# EAGLE board PCB v13 (EAGLE 9.7.0)
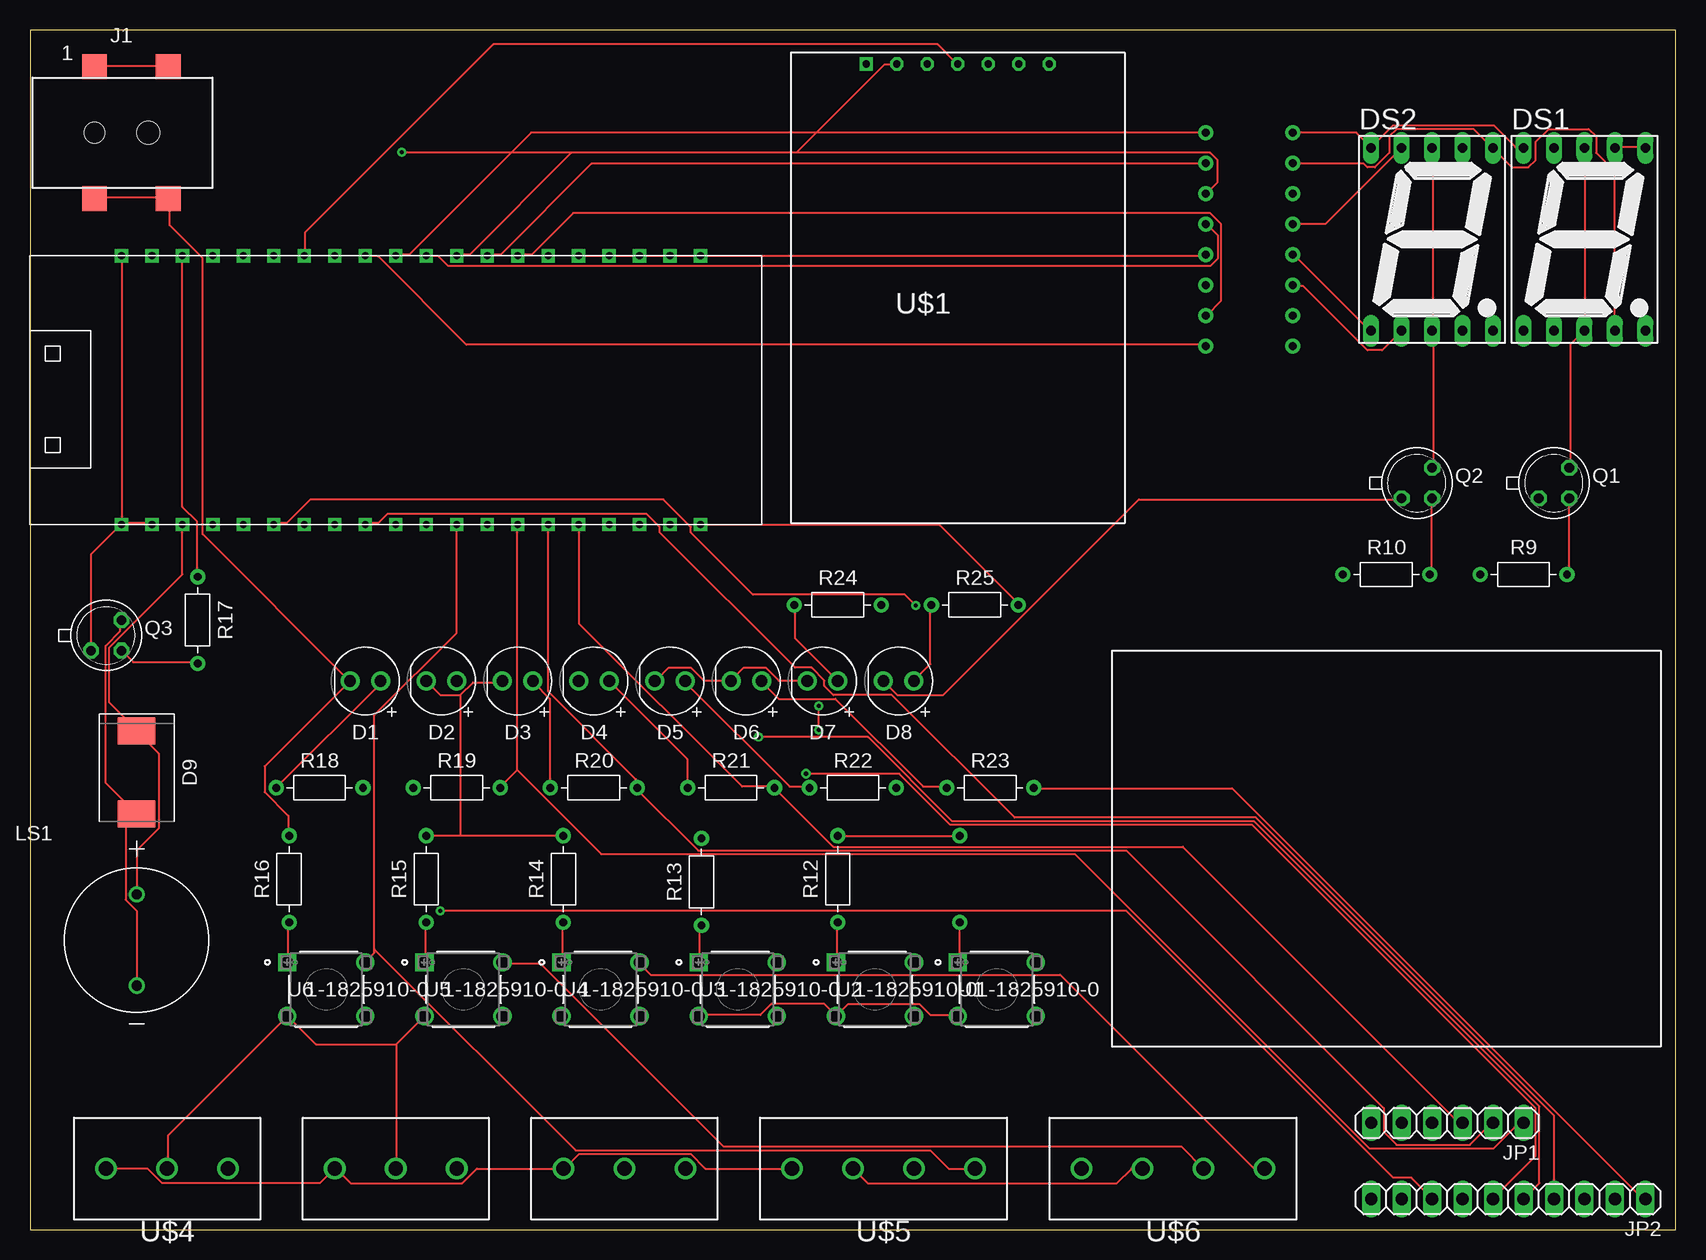
[diagram p0: board, top side]
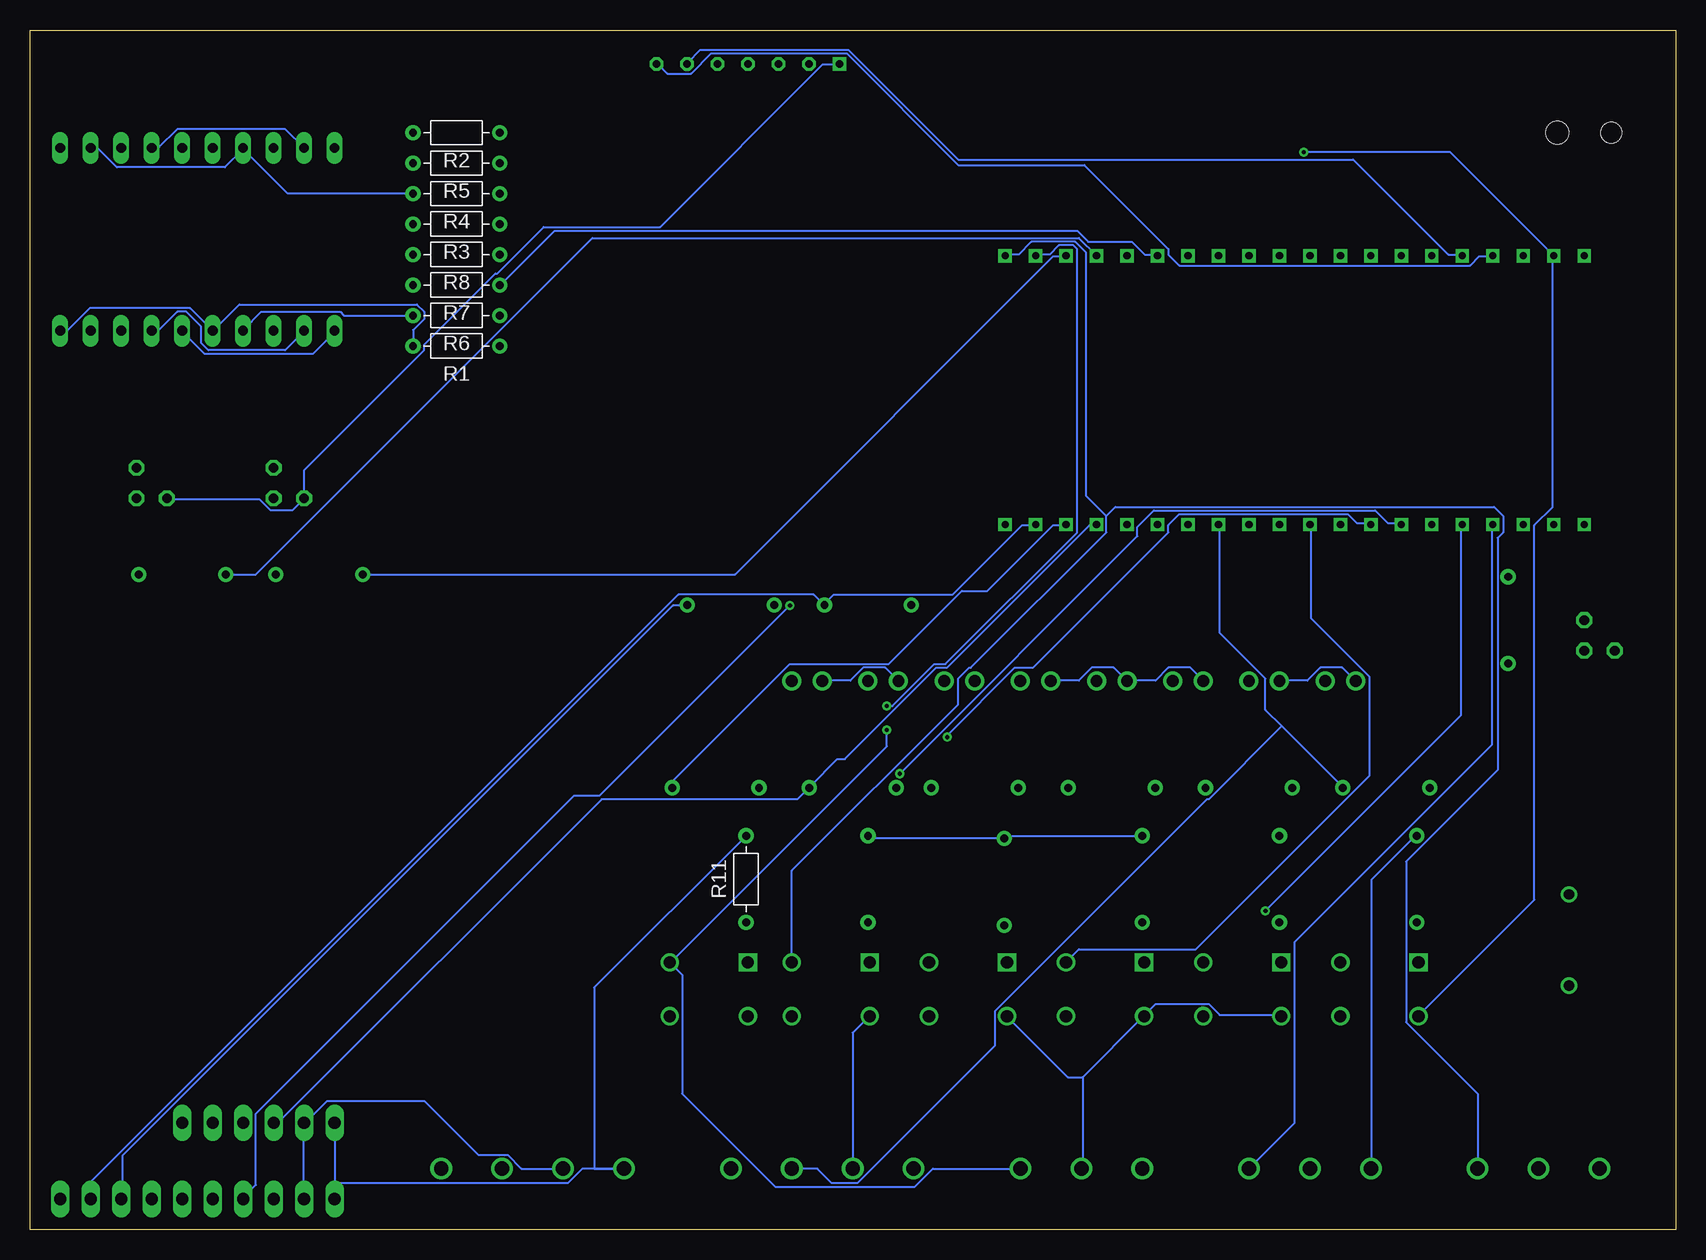
[diagram p1: board, bottom side, seen from below]

Size 137.14 x 100 mm. Coordinates in mm from the lower left corner, seen from the top.
Outline: 0,0 137.14,0 137.14,100 0,100 0,0
Copper layers (1*16): Top / Bottom
Stack-up Default Layer Stack: Top User Defined 0.035mm / Dielectric-1 User Defined 1.5mm / Bottom User Defined 0.035mm
Design rules "default": minimum track width 6mil, minimum drill 0.35mm, track to track 6mil, track to pad 6mil, pad to pad 6mil, via to via 6mil, smd to smd 6mil, copper to edge 40mil, drill to drill 6mil, minimum pad ring 10mil, minimum via ring 8mil, stop-mask expansion 4mil, vias tented up to drill 0mil, thermal gap 10mil

## Footprints (pad centres in the part's own frame; a part is rotated, then mirrored left to right if it is on the bottom)
LEDRD254W60D565H860B_G = drill 0.981 pad 1.581: 1 -1.27,0; 2 1.27,0
DIOM7959X625N = smd 2.252 x 3.12: 1 -3.457,0; 2 3.457,0
7SEG-13 = drill 0.813 long: 1 -5.08,-7.62; 2 -2.54,-7.62; 3 0,-7.62; 4 2.54,-7.62; 5 5.08,-7.62; 6 5.08,7.62; 7 2.54,7.62; 8 0,7.62; 9 -2.54,7.62; 10 -5.08,7.62
FRANZININHO = drill 0.6 square: P$1 36.83,1.168; P$2 39.37,1.168; P$3 41.91,1.168; P$4 44.45,1.168; P$5 46.99,1.168; P$6 49.53,1.168; P$7 52.07,1.168; P$8 54.61,1.168; P$9 57.15,1.168; P$10 59.69,1.168; P$11 34.29,1.168; P$12 31.75,1.168; P$13 29.21,1.168; P$14 26.67,1.168; P$15 24.13,1.168; P$16 21.59,1.168; P$17 19.05,1.168; P$18 16.51,1.168; P$19 13.97,1.168; P$20 11.43,1.168; P$21 59.69,-21.234; P$22 57.15,-21.234; P$23 54.61,-21.234; P$24 52.07,-21.234; P$25 49.53,-21.234; P$26 46.99,-21.234; P$27 44.45,-21.234; P$28 41.91,-21.234; P$29 39.37,-21.234; P$30 36.83,-21.234; P$31 34.29,-21.234; P$32 31.75,-21.234; P$33 29.21,-21.234; P$34 26.67,-21.234; P$35 24.13,-21.234; P$36 21.59,-21.234; P$37 19.05,-21.234; P$38 16.51,-21.234; P$39 13.97,-21.234; P$40 11.43,-21.234
694108106102 = smd 2.05 x 2.05: 1 -2.25,5.5; 2 -2.25,-5.5; 3 3.9,-5.5; A1 3.9,5.5 | hole 1.7: -2.25,0 | hole 1.9: 2.25,0
1X06 = drill 1.016 long: 1 -6.35,0; 2 -3.81,0; 3 -1.27,0; 4 1.27,0; 5 3.81,0; 6 6.35,0
1X10 = drill 1.016 long: 1 -11.43,0; 2 -8.89,0; 3 -6.35,0; 4 -3.81,0; 5 -1.27,0; 6 1.27,0; 7 3.81,0; 8 6.35,0; 9 8.89,0; 10 11.43,0
XDCR_AI-1223-TWT-5V-R = drill 0.85: N 0,-3.8; P 0,3.8
TO18 = drill 0.813 octagon: 1 -1.27,-1.27; 2 1.27,-1.27; 3 1.27,1.27
RESAD724W46L381D178B = drill 0.66 pad 1.26: 1 -3.62,0; 2 3.62,0
SWITCH_1-1825910-0 = drill 1.016 pad 1.524 square: 1 -6.502,4.496 | drill 1.016 pad 1.524: 2 -6.502,0; 3 0,0; 4 0,4.496
TFT = drill 0.6 octagon: BLK 7.46,17.31; DC 4.92,17.31; RES 2.38,17.31; SCL -2.7,17.31; SDA -0.16,17.31; VCC -5.24,17.31 | drill 0.6 square: GND -7.78,17.31
TERMBLK_508-3N = drill 1.2: 1 0,0; 2 5.08,0; 3 10.16,0
TERMBLK_508-4N = drill 1.2: 1 0,0; 2 5.08,0; 3 10.16,0; 4 15.24,0

## Placement (x,y rotation side)
D1  [LEDRD254W60D565H860B_G]  27.94,45.72 180 top
D2  [LEDRD254W60D565H860B_G]  34.29,45.72 180 top
D3  [LEDRD254W60D565H860B_G]  40.64,45.72 180 top
D4  [LEDRD254W60D565H860B_G]  46.99,45.72 180 top
D5  [LEDRD254W60D565H860B_G]  53.34,45.72 180 top
D6  [LEDRD254W60D565H860B_G]  59.69,45.72 180 top
D7  [LEDRD254W60D565H860B_G]  66.04,45.72 180 top
D8  [LEDRD254W60D565H860B_G]  72.39,45.72 180 top
D9  DIODE  [DIOM7959X625N]  8.89,38.1 270 top
DS1  7SEG-CA  [7SEG-13]  129.54,82.55 0 top
DS2  7SEG-CA  [7SEG-13]  116.84,82.55 0 top
FRANZ1  FRANZININHO  [FRANZININHO]  -3.81,80.01 0 top
J1  [694108106102]  7.62,91.44 0 top
JP1  PINHD-1X6  [1X06]  118.11,8.89 180 top
JP2  PINHD-1X10  [1X10]  123.19,2.54 180 top
LS1  AI-1223-TWT-5V-R  [XDCR_AI-1223-TWT-5V-R]  8.89,24.13 0 top
Q1  NPN  [TO18]  127,62.23 0 top
Q2  NPN  [TO18]  115.57,62.23 0 top
Q3  NPN  [TO18]  6.35,49.53 0 top
R1  350  [RESAD724W46L381D178B]  101.6,73.66 180 bottom
R2  350  [RESAD724W46L381D178B]  101.6,91.44 180 bottom
R3  350  [RESAD724W46L381D178B]  101.6,83.82 180 bottom
R4  350  [RESAD724W46L381D178B]  101.6,86.36 180 bottom
R5  350  [RESAD724W46L381D178B]  101.6,88.9 180 bottom
R6  350  [RESAD724W46L381D178B]  101.6,76.2 180 bottom
R7  350  [RESAD724W46L381D178B]  101.6,78.74 180 bottom
R8  350  [RESAD724W46L381D178B]  101.6,81.28 180 bottom
R9  350  [RESAD724W46L381D178B]  124.46,54.61 0 top
R10  350  [RESAD724W46L381D178B]  113.03,54.61 0 top
R11  350  [RESAD724W46L381D178B]  77.47,29.21 90 bottom
R12  350  [RESAD724W46L381D178B]  67.31,29.21 90 top
R13  350  [RESAD724W46L381D178B]  55.96,28.97 90 top
R14  350  [RESAD724W46L381D178B]  44.45,29.21 90 top
R15  350  [RESAD724W46L381D178B]  33.02,29.21 90 top
R16  350  [RESAD724W46L381D178B]  21.59,29.21 90 top
R17  350  [RESAD724W46L381D178B]  13.97,50.8 270 top
R18  350  [RESAD724W46L381D178B]  24.13,36.83 0 top
R19  350  [RESAD724W46L381D178B]  35.56,36.83 0 top
R20  350  [RESAD724W46L381D178B]  46.99,36.83 0 top
R21  350  [RESAD724W46L381D178B]  58.42,36.83 0 top
R22  350  [RESAD724W46L381D178B]  68.58,36.83 0 top
R23  350  [RESAD724W46L381D178B]  80.01,36.83 0 top
R24  350  [RESAD724W46L381D178B]  67.31,52.07 0 top
R25  350  [RESAD724W46L381D178B]  78.74,52.07 0 top
U1  1-1825910-0  [SWITCH_1-1825910-0]  83.82,17.78 0 top
U2  1-1825910-0  [SWITCH_1-1825910-0]  73.66,17.78 0 top
U3  1-1825910-0  [SWITCH_1-1825910-0]  62.23,17.78 0 top
U4  1-1825910-0  [SWITCH_1-1825910-0]  50.8,17.78 0 top
U5  1-1825910-0  [SWITCH_1-1825910-0]  39.37,17.78 0 top
U6  1-1825910-0  [SWITCH_1-1825910-0]  27.94,17.78 0 top
U$1  DISPLAY240X240IPSTFT  [TFT]  77.47,79.85 0 top
U$2  2828XX-3282837-3  [TERMBLK_508-3N]  25.4,5.08 0 top
U$3  2828XX-3282837-3  [TERMBLK_508-3N]  44.45,5.08 0 top
U$4  2828XX-3282837-3  [TERMBLK_508-3N]  6.35,5.08 0 top
U$5  2828XX-4282837-4  [TERMBLK_508-4N]  63.5,5.08 0 top
U$6  2828XX-4282837-4  [TERMBLK_508-4N]  87.63,5.08 0 top
U$7  PROTOBOARD  [PROTOBOARD]  90.17,15.24 0 top

## Library data of the parts
D1-D8 = led verde
D9 = Diode; CATEGORY: Diode; SUB-CATEGORY: Rectifier
DS1 DS2 = _led verde.e28fa6e2-375f-4f9b-b292-f28eee2f90ad.flbr; CATEGORY: Opto-Electronic; SUB-CATEGORY: Display; TYPE: 7-Segment
FRANZ1 U$7 = USB
J1 = Connector; CATEGORY: Connector; DESCRIPTION: CONN PWR JACK 2.5X5.5MM SOLDER; MANUFACTURER: Würth Elektronik; MOUNT: SMT; MPN: 694108106102; OPERATING_TEMPERATURE: -40°C to +85°C; PART_STATUS: Active; ROHS_COMPLIANCE: RoHS Compliant; SERIES: WR-DC; SUBCATEGORY: Power Connector; TYPE: Barrel-Right Angled
JP1 JP2 = Connector; CATEGORY: CONNECTOR; SUB-CATEGORY: PIN-HEADER
LS1 = Buzzer; AVAILABILITY: In Stock; DESCRIPTION: ELECTRO MECHANICAL AUDIO INDICATOR; MF: PUI Audio,; MP: AI-1223-TWT-5V-R; PACKAGE: 2225 PUI Audio; PRICE: None; PURCHASE-URL: https://pricing.snapeda.com/search/part/AI-1223-TWT-5V-R/?ref=eda
Q1-Q3 = Transistor; CATEGORY: Transistor; SUB-CATEGORY: BJT; TYPE: NPN
R1-R25 = Resistor; CATEGORY: Resistor; SUB-CATEGORY: Fixed
U1-U6 = Switches; BUILT_BY: EMA_UL_Team; CATEGORY: Tactile Switches; COPYRIGHT: Copyright (C) 2016 Accelerated Designs. All rights reserved; DESCRIPTION: FSM6JH=6MM TACT SWITCH, HIGH TEMP; MANUFACTURER_PART_NUMBER: 1-1825910-0; PART_STATUS: active; SERIES: Unknown; VENDOR: TE Connectivity
U$1 = Display tft
U$2-U$4 = Connector; CATEGORY: Connector; DESCRIPTION: TERM BLK 3P SIDE ENT 5.08mm PCB; MANUFACTURER: TE Connectivity; MPN: 282837-3; OPERATING_TEMPERATURE: -40°C to +105°C; PART_STATUS: Active; ROHS_COMPLIANCE: RoHS Compliant; SERIES: 282837; SUBCATEGORY: Terminal Block; TYPE: Side Wire Entry
U$5 U$6 = Connector; CATEGORY: Connector; DESCRIPTION: TERM BLK 4P SIDE ENT 5.08mm PCB; MANUFACTURER: TE Connectivity; MPN: 282837-4; OPERATING_TEMPERATURE: 40°C to +105°C; PART_STATUS: Active; ROHS_COMPLIANCE: RoHS Compliant; SERIES: 283737; SUBCATEGORY: Terminal Block; TYPE: Side Wire Entry

## Nets
5V5: J1.1 J1.A1
+5V: D9.1 FRANZ1.P$38 LS1.P
DGND: FRANZ1.P$20 FRANZ1.P$39 FRANZ1.P$40 Q3.1
GND: D1.2 D2.2 D3.2 D4.2 D5.2 D6.2 D7.2 D8.2 J1.2 J1.3 JP1.6 JP2.10 Q1.1 Q2.1 R11.2 R12.2 R13.2 R14.2 R15.2 R16.2 U$1.GND U$2.1 U$3.1 U$4.1 U$5.1 U$6.1
N$1: Q3.2 R17.2
N$2: D1.1 R18.1
N$3: D3.1 R20.1
N$4: D4.1 R21.1
N$5: D5.1 R22.1
N$6: D6.1 R23.1
N$7: D7.1 R24.1
N$8: DS1.9 DS2.9 R3.2
N$9: D8.1 R25.1
N$11: DS1.10 DS2.10 R2.2
N$12: DS1.5 DS2.5 R1.2
N$13: DS1.1 DS2.1 R8.2
N$14: DS1.2 DS2.2 R7.2
N$15: DS2.4 R6.2
N$16: DS1.4 DS2.6 R5.2
N$17: DS1.6 DS1.7 DS2.7 R4.2
N$18: DS1.3 DS1.8 Q1.3
N$19: DS2.3 DS2.8 Q2.3
N$20: Q1.2 R9.2
N$21: Q2.2 R10.2
N$30: R16.1 U6.1
N$31: R15.1 U5.1
N$32: R14.1 U4.1
N$33: R13.1 U3.1
N$34: R12.1 U2.1
N$35: R11.1 U1.1
N$45: D9.2 LS1.N Q3.3
P$1: FRANZ1.P$10 U2.4 U$4.3
P$2: FRANZ1.P$9 U1.4 U$3.3
P$3: FRANZ1.P$8 R10.1
P$4: FRANZ1.P$7 R9.1
P$5: FRANZ1.P$6 R8.1
P$6: FRANZ1.P$5 R7.1
P$7: FRANZ1.P$4 R6.1
P$8: FRANZ1.P$3 R5.1
P$9: FRANZ1.P$2 R4.1
P$10: FRANZ1.P$1 R3.1
P$11: FRANZ1.P$11 R2.1
P$12: FRANZ1.P$12 R1.1
P$13: U$1.SCL
P$14: FRANZ1.P$14 U$1.SDA
P$15: U$1.RES
P$16: FRANZ1.P$16 U$1.DC
P$17: FRANZ1.P$17 U$1.BLK
P$18: FRANZ1.P$18 R17.1
P$20: U3.4
P$21: FRANZ1.P$31 U4.4 U$6.4
P$22: U5.4 U$6.3
P$23: FRANZ1.P$29 U6.4 U$5.4
P$24: FRANZ1.P$28 R18.2 U$5.3
P$25: FRANZ1.P$27 JP1.1 R19.2
P$26: FRANZ1.P$26 JP1.2 R20.2
P$27: FRANZ1.P$25 JP1.3 R21.2
P$28: FRANZ1.P$24 JP1.4 R22.2
P$29: FRANZ1.P$23 JP2.1 R23.2
P$30: FRANZ1.P$22 JP2.2 R24.2
P$31: FRANZ1.P$21 JP2.3 R25.2
P$32: FRANZ1.P$32 JP2.4
P$33: FRANZ1.P$33 JP2.5
P$34: FRANZ1.P$34 JP2.6
P$35: FRANZ1.P$35 JP2.7
P$36: FRANZ1.P$36 JP2.8
P$37: FRANZ1.P$37 U$2.3
VCC: FRANZ1.P$19 JP1.5 JP2.9 U1.2 U2.2 U3.2 U4.2 U5.2 U6.2 U$1.VCC U$2.2 U$3.2 U$4.2 U$5.2 U$6.2

## Tracks (layer width: path | path; a pad name or v marks a point on that pad's centre or on a via)
5V5
  Top 0.152: J1.1 5.38,96.98 11.48,96.98 J1.A1
+5V
  Top 0.152: FRANZ1.P$38 12.7,54.61 6.6,48.51 6.6,43.94 8.89,41.66 D9.1 8.89,41.5 10.72,39.68 10.72,33.43 8.89,31.6 LS1.P
DGND
  Top 0.152: 7.67,58.88 10.11,58.88 FRANZ1.P$39 | 7.67,58.88 7.67,81.13 FRANZ1.P$20 | 7.67,58.88 FRANZ1.P$40 7.52,58.73 5.08,56.29 Q3.1
GND
  Top 0.152: 35.86,32.82 44.4,32.82 R14.2 | 35.86,32.82 33.12,32.82 R15.2 | R11.2 77.47,32.82 67.41,32.82 R12.2 | U$4.1 9.8,5.08 11.02,3.86 24.13,3.86 25.35,5.08 U$2.1 25.5,5.08 26.72,3.86 36.02,3.86 37.24,5.08 U$3.1 44.55,5.08 45.77,6.3 55.07,6.3 56.29,5.08 U$5.1 | J1.2 5.38,86 11.48,86 J1.3 11.63,85.85 11.63,83.72 14.38,80.97 14.38,57.96 26.57,45.77 D1.2 19.56,38.61 19.56,36.47 21.54,34.49 21.54,32.97 R16.2 | 35.86,44.55 36.93,45.62 39.37,45.62 D3.2 | 35.86,44.55 34.19,44.55 D2.2 | 58.42,45.77 56.13,45.77 55.07,46.84 53.24,46.84 52.17,45.77 D5.2 | 58.42,45.77 59.49,46.84 61.32,46.84 62.38,45.77 64.67,45.77 D7.2 | 58.42,45.77 D6.2 | D8.2 72.29,44.55 76.1,44.55 92.41,60.86 114.2,60.86 Q2.1 | 35.86,44.55 35.86,32.82
  Bottom 0.152: JP1.6 111.76,3.86 | 111.76,3.86 JP2.10 | R12.2 67.26,32.82 67.11,32.66 55.98,32.66 R13.2 55.83,32.66 55.68,32.82 44.55,32.82 R14.2 | R11.2 77.47,32.82 90.12,20.17 90.12,5.08 U$6.1 91.11,5.08 92.33,3.86 111.76,3.86 | U$1.GND 69.7,97.13 71.07,97.13 84.63,83.57 94.34,83.57 98.2,79.7 98.35,79.7 104.29,73.76 104.29,73.3 114.3,63.3 Q2.1 114.35,60.86 115.27,59.94 117.09,59.94 118.01,60.86 125.63,60.86 Q1.1 | D1.2 27.79,46.84 29.62,46.84 30.68,45.77 32.97,45.77 D2.2 | D3.2 39.37,45.77 40.44,46.84 42.27,46.84 43.33,45.77 45.62,45.77 D4.2 46.84,46.84 48.67,46.84 49.73,45.77 52.02,45.77 D5.2 | D7.2 65.89,46.84 67.72,46.84 68.78,45.77 71.07,45.77 D8.2 | U$2.1 25.35,5.08 25.35,29.16 21.69,32.82 R16.2
N$1
  Top 0.152: Q3.2 8.58,47.3 13.92,47.3 R17.2
N$2
  Top 0.152: R18.1 20.62,36.93 29.31,45.62 D1.1
N$3
  Top 0.152: R20.1 43.33,36.93 43.33,44.25 41.96,45.62 D3.1
N$4
  Top 0.152: D4.1 54.76,39.22 54.76,36.93 R21.1
N$5
  Top 0.152: R22.1 64.82,36.93 63.3,36.93 54.61,45.62 D5.1
N$6
  Top 0.152: R23.1 76.25,36.93 74.42,36.93 67.11,44.25 62.38,44.25 61.01,45.62 D6.1
N$7
  Top 0.152: D7.1 63.75,49.28 63.75,52.02 R24.1
N$8
  Top 0.152: R3.2 107.95,83.82 DS2.9
  Bottom 0.152: DS2.9 115.88,91.74 124.87,91.74 126.39,90.22 127,90.22 DS1.9
N$9
  Top 0.152: R25.1 75.03,52.02 75.03,47.14 73.66,45.77 D8.1
N$11
  Top 0.152: R2.2 110.54,91.44 111.76,90.22 | 111.76,90.22 113.59,92.05 121.97,92.05 123.8,90.22 124.41,90.22 DS1.10 | 111.76,90.22 DS2.10
N$12
  Bottom 0.152: R1.2 105.21,73.76 105.21,74.98 104.29,75.89 104.29,76.5 104.9,77.11 119.69,77.11 121.82,74.98 DS2.5 123.8,76.81 132.18,76.81 134.01,74.98 134.62,74.98 DS1.5
N$13
  Top 0.152: R8.2 105.36,81.23 111.76,74.83 DS2.1
  Bottom 0.152: DS1.1 124.41,74.83 122.58,73 113.59,73 111.76,74.83 DS2.1
N$14
  Top 0.152: DS2.2 112.67,73.3 111.45,73.3 106.12,78.64 105.36,78.64 R7.2
  Bottom 0.152: DS1.2 127,74.98 126.39,74.98 124.87,76.5 124.1,76.5 122.89,75.29 122.89,73.91 122.28,73.3 115.88,73.3 114.35,74.83 DS2.2
N$15
  Bottom 0.152: R6.2 111,76.2 111.3,76.5 117.86,76.5 119.38,74.98 DS2.4
N$16
  Top 0.152: R5.2 105.36,88.85 111.15,88.85 111.45,88.54 112.06,88.54 113.28,89.76 113.28,91.13 113.89,91.74 120.29,91.74 121.82,90.22 DS2.6 121.97,90.07 123.5,88.54 124.87,88.54 125.48,89.15 125.48,90.68 126.54,91.74 129.9,91.74 130.5,91.13 130.5,89.76 132.03,88.24 132.03,74.98 DS1.4
N$17
  Top 0.152: DS1.7 132.18,90.22 134.62,90.22 DS1.6
  Bottom 0.152: 119.38,90.07 115.72,86.41 105.36,86.41 R4.2 | 119.38,90.07 120.9,88.54 129.9,88.54 131.42,90.07 132.03,90.07 DS1.7 | 119.38,90.07 DS2.7
N$18
  Top 0.152: Q1.3 128.37,63.6 128.37,73.76 DS1.3 129.59,74.98 129.59,90.07 DS1.8
N$19
  Top 0.152: Q2.3 116.94,63.6 116.94,74.83 DS2.3 116.94,74.98 116.94,90.07 DS2.8
N$20
  Top 0.152: R9.2 128.22,54.61 128.22,60.86 Q1.2
N$21
  Top 0.152: R10.2 116.79,54.61 116.79,60.86 Q2.2
N$30
  Top 0.152: R16.1 21.54,25.5 21.54,22.3 U6.1
N$31
  Top 0.152: R15.1 32.97,25.5 32.97,22.3 U5.1
N$32
  Top 0.152: R14.1 44.4,25.5 44.4,22.3 U4.1
N$33
  Top 0.152: R13.1 55.83,25.35 55.83,22.3 U3.1
N$34
  Top 0.152: R12.1 67.26,25.5 67.26,22.3 U2.1
N$35
  Top 0.152: R11.1 77.47,22.45 77.32,22.3 U1.1
N$45
  Top 0.152: Q3.3 7.52,50.8 7.52,49.89 6.3,48.67 6.3,37.24 D9.2 8.89,34.49 7.98,33.58 7.98,27.48 8.89,26.57 LS1.N
P$1
  Bottom 0.152: 47.45,59.49 49.12,61.16 49.12,81.43 50.04,82.35 53.7,82.35 54.76,81.28 55.83,81.28 FRANZ1.P$10 | 47.45,59.49 47.45,58.12 58.72,46.84 58.88,46.84 59.79,45.92 59.79,43.79 73.66,29.92 U2.4 | U$4.3 16.51,11.33 22.45,17.27 22.45,30.68 14.83,38.3 14.83,57.66 14.38,58.12 14.38,59.49 15.14,60.25 46.69,60.25 47.45,59.49
P$2  (via drill 0.35)
  Top 0.152: v65.73,41.66 v65.73,43.64
  Bottom 0.152: v65.73,43.64 65.28,43.64 61.77,47.14 60.86,47.14 49.89,58.12 49.89,81.74 50.19,82.04 51.41,82.04 52.17,81.28 53.24,81.28 FRANZ1.P$9 | v65.73,41.66 65.73,40.28 83.72,22.3 U1.4 83.72,22.15 82.8,21.23 82.8,11.33 75.03,3.56 63.43,3.56 61.9,5.08 U$3.3
P$3
  Bottom 0.152: R10.1 78.38,54.61 51.87,81.13 50.8,81.13 FRANZ1.P$8
P$4
  Bottom 0.152: FRANZ1.P$7 49.73,82.65 90.27,82.65 118.31,54.61 R9.1
P$5
  Top 0.152: FRANZ1.P$6 45.77,81.13 97.89,81.13 97.86,81.16 R8.1
P$6
  Bottom 0.152: FRANZ1.P$5 43.18,81.28 44.25,81.28 45.31,82.35 48.97,82.35 49.89,83.26 93.42,83.26 97.89,78.79 R7.1
P$7
  Top 0.152: FRANZ1.P$4 40.74,81.28 41.81,81.28 45.26,84.73 98.35,84.73 99.26,83.82 99.26,77.42 98.04,76.2 R6.1
P$8
  Top 0.152: FRANZ1.P$3 38.15,81.28 39.22,81.28 46.79,88.85 97.89,88.85 R5.1
P$9
  Top 0.152: FRANZ1.P$2 35.56,81.28 36.63,81.28 45.11,89.76 98.35,89.76 98.96,89.15 98.96,87.33 98.04,86.41 R4.1
P$10
  Top 0.152: FRANZ1.P$1 33.12,81.13 34.04,81.13 34.85,80.31 98.35,80.31 98.96,80.92 98.96,82.91 98.04,83.82 R3.1
P$11
  Top 0.152: R2.1 41.76,91.44 31.6,81.28 30.53,81.28 FRANZ1.P$11
P$12
  Top 0.152: FRANZ1.P$12 27.94,81.13 29.01,81.13 36.37,73.76 97.89,73.76 R1.1
P$14
  Top 0.152: FRANZ1.P$14 22.91,81.28 22.91,83.11 38.61,98.81 75.64,98.81 77.17,97.28 U$1.SDA
P$16
  Bottom 0.152: FRANZ1.P$16 17.88,81.28 18.95,81.28 26.87,89.2 59.79,89.2 68.94,98.35 81.28,98.35 82.35,97.28 U$1.DC
P$17
  Bottom 0.152: FRANZ1.P$17 15.29,81.13 16.36,81.13 17.12,80.37 41.35,80.37 42.27,81.28 42.27,81.74 49.28,88.75 59.79,88.75 69.09,98.04 80.37,98.04 82.04,96.37 84.02,96.37 84.78,97.13 U$1.BLK
P$18
  Top 0.152: FRANZ1.P$18 12.7,60.25 13.92,59.03 13.92,54.46 R17.1
P$21
  Top 0.152: U$6.4 102.01,5.08 85.85,21.23 51.71,21.23 50.8,22.15 U4.4
  Bottom 0.152: FRANZ1.P$31 30.38,58.73 30.38,50.95 25.5,46.08 25.5,37.85 39.98,23.37 49.73,23.37 50.8,22.3 U4.4
P$22
  Top 0.152: U$6.3 95.96,6.91 57.81,6.91 42.57,22.15 39.37,22.15 U5.4
P$23
  Top 0.152: FRANZ1.P$29 35.56,49.73 28.7,42.88 28.7,23.37 | 28.7,23.37 28.7,23.06 27.94,22.3 U6.4 | U$5.4 76.56,5.08 75.03,6.6 45.47,6.6 28.7,23.37
P$24
  Bottom 0.152: 32.82,41.96 27.79,36.93 R18.2 | 32.82,41.96 34.19,43.33 34.19,45.92 38,49.73 38,58.73 FRANZ1.P$28 | U$5.3 71.53,5.08 70.31,3.86 68.2,3.86 56.74,15.32 56.74,18.19 39.06,35.87 38.91,35.87 32.82,41.96
P$25
  Top 0.152: 40.59,38.3 40.59,58.73 FRANZ1.P$27 | 40.59,38.3 39.22,36.93 R19.2 | JP1.1 124.1,8.89 121.97,6.76 111.61,6.76 87.07,31.29 47.6,31.29 40.59,38.3
P$26
  Top 0.152: FRANZ1.P$26 43.18,44.86 50.5,37.54 50.5,36.93 R20.2 50.5,36.78 55.68,31.6 91.34,31.6 112.83,10.11 112.83,8.13 113.89,7.06 119.99,7.06 121.82,8.89 JP1.2
P$27
  Top 0.152: FRANZ1.P$25 45.77,58.73 45.77,50.5 59.33,36.93 61.92,36.93 R21.2 62.08,36.78 66.95,31.9 96.06,31.9 119.08,8.89 JP1.3
P$28
  Bottom 0.152: FRANZ1.P$24 48.36,58.73 48.82,58.73 60.71,46.84 61.62,46.84 69.24,39.22 69.85,39.22 72.14,36.93 R22.2 72.29,36.78 73.2,35.87 89.51,35.87 116.48,8.89 JP1.4
P$29
  Top 0.152: JP2.1 134.62,2.64 134.31,2.64 100.18,36.78 83.72,36.78 R23.2
  Bottom 0.152: FRANZ1.P$23 50.8,58.73 51.87,58.73 57.35,53.24 59.49,53.24 65.58,47.14 73.81,47.14 83.57,37.39 83.57,36.93 R23.2
P$30
  Bottom 0.152: FRANZ1.P$22 53.39,58.73 54.46,58.73 60.25,52.93 70.16,52.93 70.92,52.17 R24.2 71.07,52.17 71.83,52.93 83.11,52.93 132.03,4.01 132.03,2.64 JP2.2
P$31
  Top 0.152: FRANZ1.P$21 55.98,58.73 75.79,58.73 82.35,52.17 R25.2
  Bottom 0.152: JP2.3 129.44,2.64 129.44,6.15 83.57,52.02 82.5,52.02 R25.2
P$32
  Top 0.152: JP2.4 127,9.5 102.16,34.34 82.04,34.34 71.83,44.55 66.95,44.55 66.19,45.31 66.19,45.77 65.13,46.84 63.75,46.84 52.48,58.12 52.48,58.57 51.41,59.64 29.77,59.64 29.01,58.88 27.94,58.88 FRANZ1.P$32
P$33  (via drill 0.35)
  Top 0.152: v60.71,41.05 69.85,41.05 76.86,34.04 102.01,34.04 125.78,10.26 125.78,3.86 JP2.5
  Bottom 0.152: v60.71,41.05 60.71,41.2 55.07,46.84 53.54,46.84 42.27,58.12 42.27,58.73 41.35,59.64 27.33,59.64 26.57,58.88 25.5,58.88 FRANZ1.P$33
P$34  (via drill 0.35)
  Top 0.152: v64.67,38 72.44,38 76.71,33.73 101.85,33.73 125.48,10.11 125.48,6.15 121.97,2.64 JP2.6
  Bottom 0.152: v64.67,38 44.86,57.81 44.86,58.57 43.48,59.94 25.04,59.94 23.98,58.88 22.91,58.88 FRANZ1.P$34
P$35  (via drill 0.35)
  Top 0.152: v73.81,52.02 72.9,52.93 60.25,52.93 55.07,58.12 55.07,58.57 52.78,60.86 23.37,60.86 21.39,58.88 20.32,58.88 FRANZ1.P$35
  Bottom 0.152: v73.81,52.02 89.66,36.17 91.8,36.17 118.31,9.65 118.31,3.71 119.38,2.64 JP2.7
P$36  (via drill 0.35)
  Top 0.152: v34.19,26.57 91.34,26.57 113.59,4.32 115.11,4.32 116.79,2.64 JP2.8
  Bottom 0.152: v34.19,26.57 17.88,42.88 17.88,58.73 FRANZ1.P$36
P$37
  Bottom 0.152: U$2.3 31.75,8.89 31.75,23.98 15.29,40.44 15.29,58.73 FRANZ1.P$37
VCC  (via drill 0.35)
  Top 0.152: 30.53,15.44 30.53,5.08 U$2.2 | U5.2 30.53,15.44 | U3.2 55.83,17.88 60.86,17.88 61.77,18.8 66.19,18.8 67.11,17.88 U2.2 68.17,18.8 74.12,18.8 75.03,17.88 77.32,17.88 U1.2 | U$6.2 91.8,5.08 90.58,3.86 69.8,3.86 U$5.2 | v30.99,89.81 63.91,89.81 71.22,97.13 72.14,97.13 U$1.VCC | U$4.2 11.48,5.08 11.48,7.82 U6.2 21.54,17.73 23.82,15.44 30.53,15.44
  Bottom 0.152: U5.2 32.97,17.88 38,17.88 38.91,18.8 43.33,18.8 44.25,17.88 U4.2 44.4,17.73 49.43,12.7 | 49.43,12.7 49.43,5.08 U$3.2 | JP2.9 114.35,2.64 114.35,8.89 JP1.5 114.2,8.89 112.37,10.72 104.29,10.72 99.78,6.21 97.32,6.21 96.19,5.08 U$6.2 | U$5.2 68.58,16.41 67.26,17.73 U2.2 | 49.43,12.7 50.65,12.7 U3.2 | U6.2 21.39,17.88 11.79,27.48 11.79,58.73 10.26,60.25 10.26,81.13 FRANZ1.P$19 18.8,89.81 v30.99,89.81